# EAGLE board Rev B (EAGLE 6.5.0)
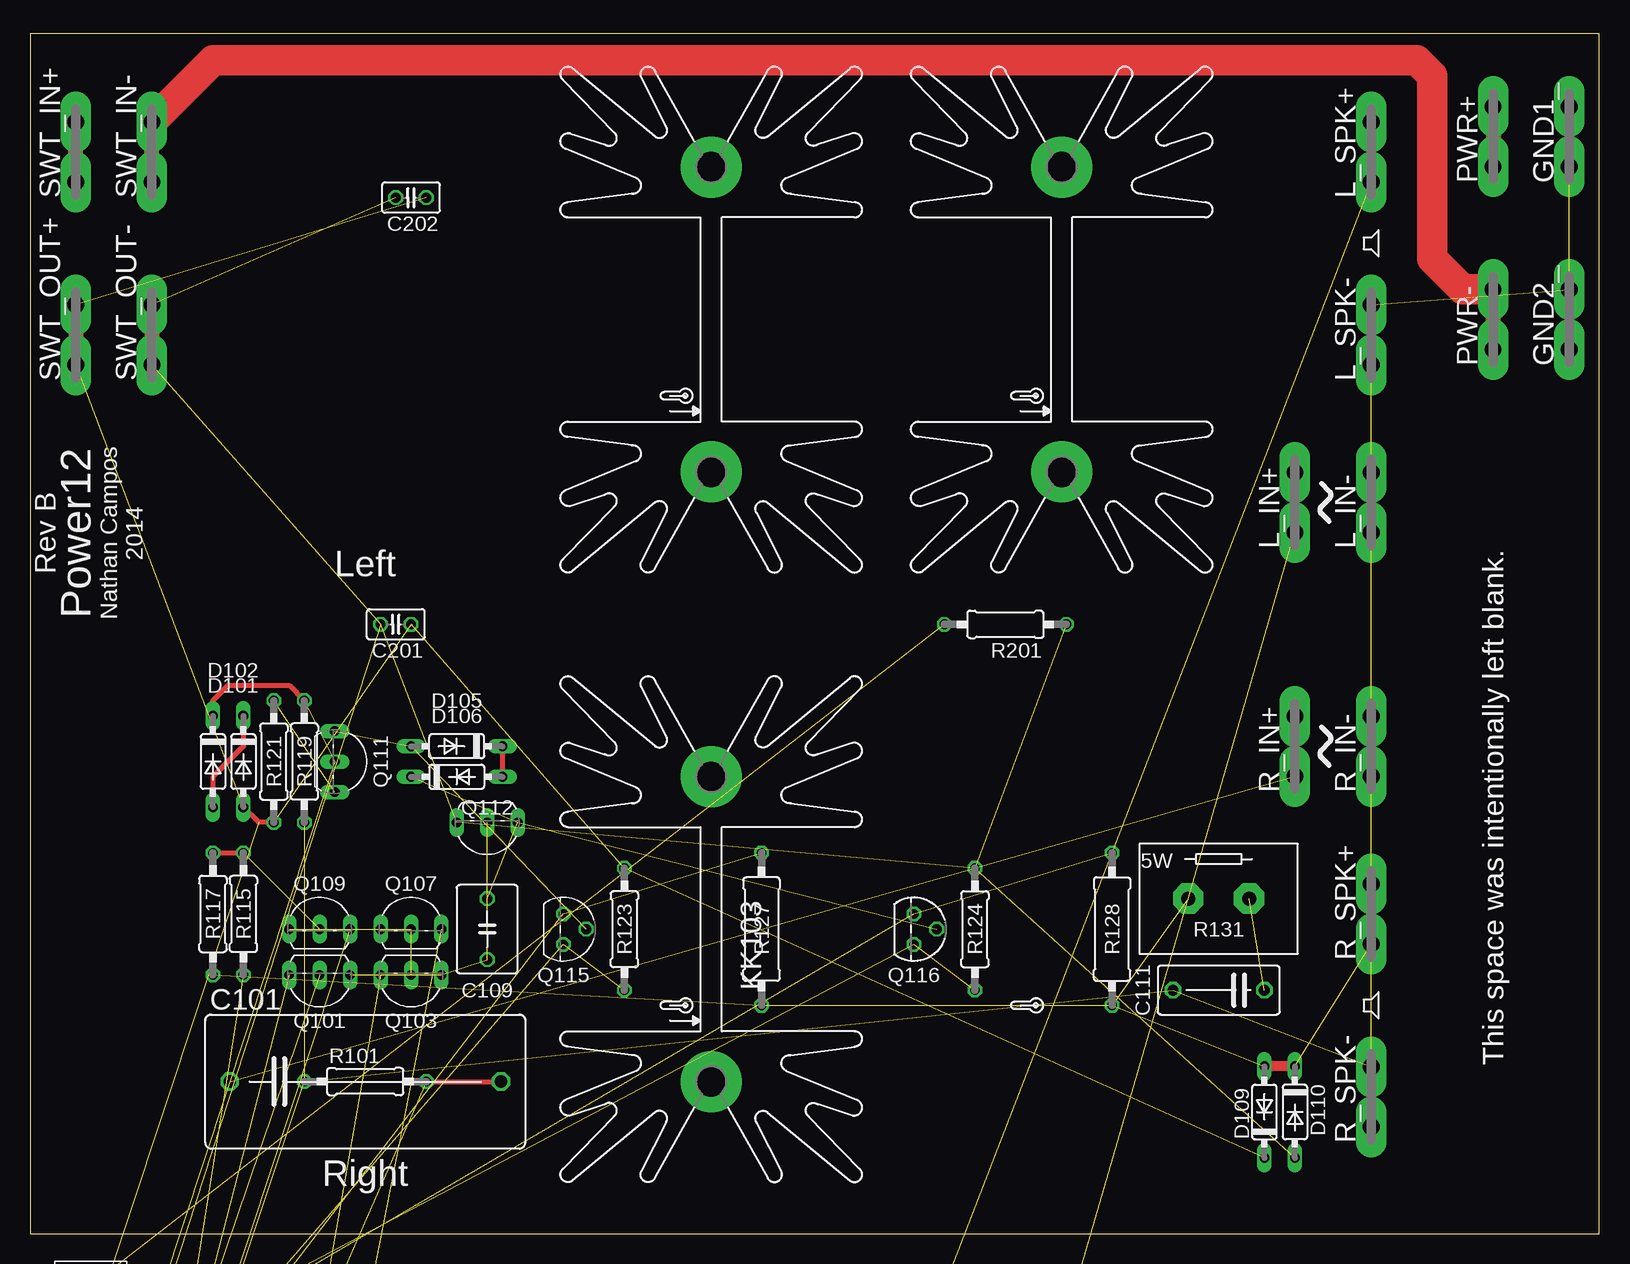
[diagram p0: board, top side]
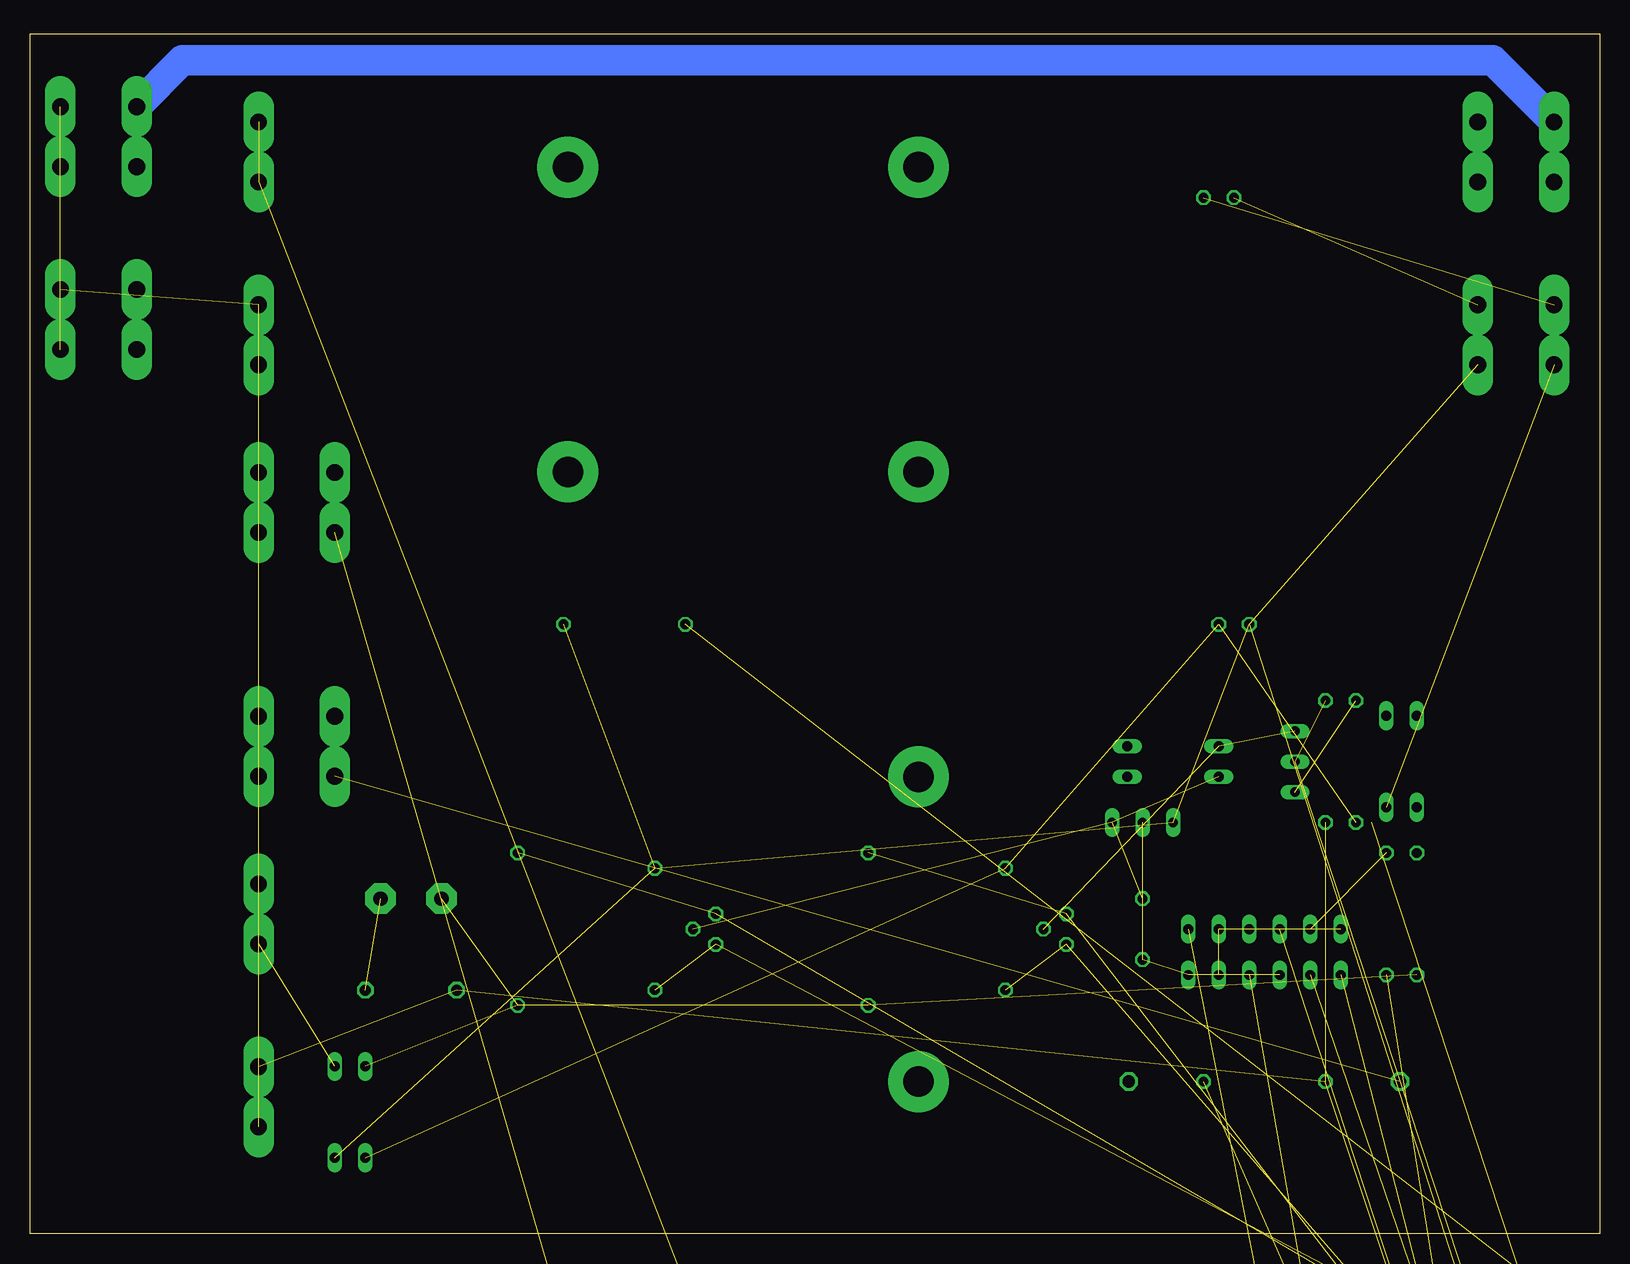
[diagram p1: board, bottom side, seen from below]

Size 130.79 x 100 mm. Coordinates in mm from the lower left corner, seen from the top.
Outline: 0,0 130.79,0 130.79,100 0,100 0,0
Copper layers (1*2*15*16): Top 0.035mm / dielectric 0.2mm / Route2 0.0175mm / dielectric 1.1mm / Route15 0.0175mm / dielectric 0.2mm / Bottom 0.035mm
Design rules "SeeedStudio_DRU_no_angle_20130527": minimum track width 6mil, minimum drill 12mil, track to track 6mil, track to pad 6mil, pad to pad 6mil, via to via 6mil, smd to smd 0mil, copper to edge 10mil, drill to drill 10mil, minimum pad ring 6mil, minimum via ring 6mil, stop-mask expansion 2mil, vias tented up to drill 25mil, thermal gap 10mil

## Footprints (pad centres in the part's own frame; a part is rotated, then mirrored left to right if it is on the bottom)
C225-113X268 = drill 1.016 octagon: 1 -11.303,0; 2 11.303,0
C025-025X050 = drill 0.813 octagon: 1 -1.27,0; 2 1.27,0
E5-10,5 = drill 1.016 pad 2.54: + -2.54,0 | drill 1.016 pad 2.54 octagon: - 2.54,0
E2-5 = drill 0.813 pad 1.27: + -1.016,0 | drill 0.813 pad 1.27 octagon: - 1.016,0
C050-050X075 = drill 0.813 octagon: 1 -2.54,0; 2 2.54,0
C075-042X103 = drill 0.914 octagon: 1 -3.81,0; 2 3.81,0
E7,5-16 = drill 1.016 pad 3.15: + -3.81,0 | drill 1.016 pad 3.15 octagon: - 3.81,0
DO35-7 = drill 0.813 long: A 3.81,0; C -3.81,0
F061.100 = drill 1.4 pad 2.54 long: A1 -2.5,0; A2 2.5,0
SK129 = drill 2.54 pad 5.08: A2,5 -12.7,-0.889; B2,5 12.7,-0.889
JST-PH-2-THM = drill 0.8 pad 1.422: 1 1,0; 2 -1,0
TO92-EBC = drill 0.813 long: B 0,-1.27; C -2.54,-1.27; E 2.54,-1.27
TO92 = drill 0.813 octagon: 1 1.27,0; 2 0,1.905; 3 -1.27,0
TO220AV = drill 1.016 long: B -2.54,-2.54; C 0,-2.54; E 2.54,-2.54
0207/10 = drill 0.813 octagon: 1 -5.08,0; 2 5.08,0
0309/12 = drill 0.813 octagon: 1 -6.35,0; 2 6.35,0
MNS-5 = drill 1.194 pad 2.54 octagon: 1 -2.54,0; 2 2.54,0

## Placement (x,y rotation side)
C101  4.7uF  [C225-113X268]  27.94,12.7 0 top
C102  4.7uF  [C225-113X268]  49.53,-172.72 0 top  (outside the outline)
C103  10nF  [C025-025X050]  -5.08,-67.31 0 top  (outside the outline)
C104  10nF  [C025-025X050]  46.99,-207.01 0 top  (outside the outline)
C105  220uF  [E5-10,5]  -2.54,-121.92 0 top  (outside the outline)
C106  220uF  [E5-10,5]  11.43,-196.85 0 top  (outside the outline)
C107  2.2uF  [E2-5]  -5.08,-73.66 0 top  (outside the outline)
C108  2.2uF  [E2-5]  31.75,-222.25 0 top  (outside the outline)
C109  100pF  [C050-050X075]  38.1,25.4 90 top
C110  100pF  [C050-050X075]  39.37,-208.28 0 top  (outside the outline)
C111  100n  [C075-042X103]  99.06,20.32 180 top
C112  100n  [C075-042X103]  55.88,-207.01 0 top  (outside the outline)
C201  100nF  [C025-025X050]  30.48,50.8 180 top
C202  100nF  [C025-025X050]  31.75,86.36 180 top
C203  4700uF  [E7,5-16]  0,-107.95 0 top  (outside the outline)
C204  4700uF  [E7,5-16]  0,-90.17 0 top  (outside the outline)
D101  1N4148DO35-7  [DO35-7]  17.78,39.37 270 top
D102  1N4148DO35-7  [DO35-7]  15.24,39.37 270 top
D103  1N4148DO35-7  [DO35-7]  16.51,-222.25 0 top  (outside the outline)
D104  1N4148DO35-7  [DO35-7]  -2.54,-222.25 0 top  (outside the outline)
D105  1N4148DO35-7  [DO35-7]  35.56,40.64 180 top
D106  1N4148DO35-7  [DO35-7]  35.56,38.1 0 top
D107  1N4148DO35-7  [DO35-7]  35.56,-215.9 0 top  (outside the outline)
D108  1N4148DO35-7  [DO35-7]  16.51,-215.9 0 top  (outside the outline)
D109  1N4148DO35-7  [DO35-7]  102.87,10.16 90 top
D110  1N4148DO35-7  [DO35-7]  105.41,10.16 270 top
D111  1N4148DO35-7  [DO35-7]  -2.54,-215.9 0 top  (outside the outline)
D112  1N4148DO35-7  [DO35-7]  54.61,-215.9 0 top  (outside the outline)
GND1_  PIN2F061.100  [F061.100]  128.27,91.44 90 top
GND2_  PIN2F061.100  [F061.100]  128.27,76.2 90 top
KK101  SK129-PAD  [SK129]  85.09,76.2 90 top
KK102  SK129-PAD  [SK129]  55.88,76.2 90 top
KK103  SK129-PAD  [SK129]  55.88,25.4 90 top
KK104  SK129-PAD  [SK129]  13.97,-176.53 0 top  (outside the outline)
L_IN+  PIN2F061.100  [F061.100]  105.41,60.96 90 top
L_IN-  PIN2F061.100  [F061.100]  111.76,60.96 90 top
L_SPK+  PIN2F061.100  [F061.100]  111.76,90.17 90 top
L_SPK-  PIN2F061.100  [F061.100]  111.76,74.93 90 top
ON  [JST-PH-2-THM]  5.08,-5.08 0 top  (outside the outline)
PWR+  PIN2F061.100  [F061.100]  121.92,91.44 90 top
PWR-  PIN2F061.100  [F061.100]  121.92,76.2 90 top
Q101  BC560C  [TO92-EBC]  24.13,20.32 180 top
Q102  BC560C  [TO92-EBC]  55.88,-194.31 0 top  (outside the outline)
Q103  BC550B  [TO92-EBC]  31.75,20.32 180 top
Q104  BC550B  [TO92-EBC]  21.59,-207.01 0 top  (outside the outline)
Q105  BC560C  [TO92-EBC]  -5.08,-52.07 0 top  (outside the outline)
Q106  BC560C  [TO92-EBC]  30.48,-207.01 0 top  (outside the outline)
Q107  BC550B  [TO92-EBC]  31.75,26.67 0 top
Q108  BC550B  [TO92-EBC]  3.81,-207.01 0 top  (outside the outline)
Q109  BC560C  [TO92-EBC]  24.13,26.67 0 top
Q110  BC560C  [TO92-EBC]  -5.08,-207.01 0 top  (outside the outline)
Q111  BC560C  [TO92-EBC]  26.67,39.37 270 top
Q112  BC550B  [TO92-EBC]  38.1,33.02 180 top
Q113  BC560C  [TO92-EBC]  46.99,-194.31 0 top  (outside the outline)
Q114  BC550B  [TO92-EBC]  12.7,-207.01 0 top  (outside the outline)
Q115  2N3904  [TO92]  44.45,25.4 270 top
Q116  2N3906  [TO92]  73.66,25.4 270 top
Q117  2N3904  [TO92]  22.86,-228.6 0 top  (outside the outline)
Q118  2N3906  [TO92]  8.89,-228.6 0 top  (outside the outline)
Q119  TIP42C  [TO220AV]  6.35,-20.32 0 top  (outside the outline)
Q120  TIP41C  [TO220AV]  6.35,-10.16 0 top  (outside the outline)
Q121  TIP42C  [TO220AV]  36.83,-191.77 0 top  (outside the outline)
Q122  TIP41C  [TO220AV]  25.4,-191.77 0 top  (outside the outline)
R101  10kΩ  [0207/10]  27.94,12.7 0 top
R102  10kΩ  [0207/10]  40.64,-229.87 0 top  (outside the outline)
R103  100Ω  [0207/10]  -2.54,-80.01 0 top  (outside the outline)
R104  100Ω  [0207/10]  22.86,-240.03 0 top  (outside the outline)
R105  22Ω  [0207/10]  6.35,-57.15 0 top  (outside the outline)
R106  56Ω  [0207/10]  -2.54,-130.81 0 top  (outside the outline)
R107  22Ω  [0207/10]  -2.54,-240.03 0 top  (outside the outline)
R108  56Ω  [0207/10]  35.56,-240.03 0 top  (outside the outline)
R109  100Ω  [0207/10]  -2.54,-62.23 0 top  (outside the outline)
R110  100Ω  [0207/10]  10.16,-240.03 0 top  (outside the outline)
R111  22Ω  [0207/10]  6.35,-52.07 0 top  (outside the outline)
R112  56Ω  [0207/10]  -2.54,-135.89 0 top  (outside the outline)
R113  22Ω  [0207/10]  60.96,-234.95 0 top  (outside the outline)
R114  56Ω  [0207/10]  48.26,-240.03 0 top  (outside the outline)
R115  560Ω  [0207/10]  17.78,26.67 90 top
R116  560Ω  [0207/10]  10.16,-234.95 0 top  (outside the outline)
R117  10kΩ  [0207/10]  15.24,26.67 270 top
R118  10kΩ  [0207/10]  22.86,-234.95 0 top  (outside the outline)
R119  4.7kΩ  [0207/10]  22.86,39.37 90 top
R120  4.7kΩ  [0207/10]  35.56,-234.95 0 top  (outside the outline)
R121  560  [0207/10]  20.32,39.37 270 top
R122  560  [0207/10]  48.26,-234.95 0 top  (outside the outline)
R123  1kΩ  [0207/10]  49.53,25.4 90 top
R124  1kΩ  [0207/10]  78.74,25.4 270 top
R125  1kΩ  [0207/10]  53.34,-229.87 0 top  (outside the outline)
R126  1kΩ  [0207/10]  -2.54,-234.95 0 top  (outside the outline)
R127  0.33Ω  [0309/12]  60.96,25.4 90 top
R128  0.33Ω  [0309/12]  90.17,25.4 270 top
R129  0.33Ω  [0309/12]  48.26,-223.52 0 top  (outside the outline)
R130  0.33Ω  [0309/12]  -1.27,-229.87 0 top  (outside the outline)
R131  10Ω  [MNS-5]  99.06,27.94 180 top
R132  10Ω  [MNS-5]  -1.27,-198.12 0 top  (outside the outline)
R201  4.7kΩ  [0207/10]  81.28,50.8 180 top
R_IN+  PIN2F061.100  [F061.100]  105.41,40.64 90 top
R_IN-  PIN2F061.100  [F061.100]  111.76,40.64 90 top
R_SPK+  PIN2F061.100  [F061.100]  111.76,26.67 90 top
R_SPK-  PIN2F061.100  [F061.100]  111.76,11.43 90 top
SWT_IN+  PIN2F061.100  [F061.100]  3.81,90.17 90 top
SWT_IN-  PIN2F061.100  [F061.100]  10.16,90.17 90 top
SWT_OUT+  PIN2F061.100  [F061.100]  3.81,74.93 90 top
SWT_OUT-  PIN2F061.100  [F061.100]  10.16,74.93 90 top
U$1  [ICON_SPEAKER]  111.76,19.05 0 top
U$2  [ICON_SPEAKER]  111.76,82.55 0 top
U$3  [ICON_TEMP]  83.82,69.85 90 top
U$4  [ICON_TEMP]  54.61,69.85 90 top
U$5  [ICON_TEMP]  83.82,19.05 90 top
U$6  [ICON_TEMP]  54.61,19.05 90 top
U$7  [ICON_AC]  107.95,40.64 90 top
U$8  [ICON_AC]  107.95,60.96 90 top

## Library data of the parts
C101-C112 C201-C204 R101-R130 R201 = rcl
D101-D112 = diode
GND1_ GND2_ L_IN+ L_IN- L_SPK+ L_SPK- PWR+ PWR- R_IN+ R_IN- R_SPK+ R_SPK- SWT_IN+ SWT_IN- SWT_OUT+ SWT_OUT- = con-faston; OC_FARNELL: unknown; OC_NEWARK: unknown
KK101-KK104 = heatsink
ON = adafruit
Q101 Q102 Q105 Q106 Q109-Q111 Q113 Q116 Q118 = transistor-pnp
Q103 Q104 Q107 Q108 Q112 Q114 Q115 Q117 = transistor-npn
Q119-Q122 = transistor-power
R131 R132 = resistor-power; OC_FARNELL: unknown; OC_NEWARK: unknown
U$1-U$8 = dicons

## Nets
GND: C103.2 C104.2 C105.- C106.- C107.- C108.- C111.2 C112.2 C203.+ C204.- GND1_.A1 GND1_.A2 GND2_.A1 GND2_.A2 L_IN-.A1 L_IN-.A2 L_SPK-.A1 L_SPK-.A2 R101.1 R102.1 R119.1 R120.1 R_IN-.A1 R_IN-.A2 R_SPK-.A1 R_SPK-.A2
L_OUT: D111.A D112.C L_SPK+.A1 L_SPK+.A2 R118.2 R129.1 R130.2 R132.2
N$1: D105.A Q111.C Q115.2
N$2: Q109.E R111.1
N$3: Q103.B Q107.B Q107.C Q109.C
N$4: C103.1 Q101.B R103.2
N$5: C101.2 R101.2 R103.1
N$6: C107.+ D102.C Q105.B Q111.B R119.2
N$7: C101.1 R_IN+.A1 R_IN+.A2
N$8: C109.1 Q101.C Q103.C Q112.B
N$9: D101.C D102.A
N$10: ON.2 R201.2
N$11: Q111.E R121.1
N$12: C105.+ R115.1
N$13: Q103.E R106.2
N$14: Q107.E R112.2
N$15: C102.1 L_IN+.A1 L_IN+.A2
N$16: C111.1 R131.1
N$17: Q104.B Q108.B Q108.C Q110.C
N$18: Q101.E R105.1
N$19: Q105.C R105.2 R111.2
N$20: Q105.E R109.1
N$21: C102.2 R102.2 R104.1
N$22: Q110.E R113.1
N$23: C110.1 Q102.C Q104.C Q114.B
N$24: D105.C D106.A
N$25: D107.C D108.A
N$26: Q115.1 Q119.B R123.1
N$27: Q116.1 Q120.B R124.2
N$28: Q116.3 Q120.C R128.1
N$29: Q115.3 Q119.C R127.2
N$30: D107.A Q113.C Q117.2
N$31: C109.2 D106.C Q112.C Q116.2
N$32: Q109.B R115.2 R117.1
N$33: Q117.1 Q121.B R125.1
N$34: Q117.3 Q121.C R129.2
N$35: Q118.1 Q122.B R126.2
N$36: Q118.3 Q122.C R130.1
N$37: C110.2 D108.C Q114.C Q118.2
N$38: Q110.B R116.2 R118.1
N$39: C108.+ D104.C Q106.B Q113.B R120.2
N$40: D103.C D104.A
N$41: Q113.E R122.1
N$42: C112.1 R132.1
N$43: Q102.E R107.1
N$44: Q106.C R107.2 R113.2
N$45: Q106.E R110.1
N$46: C104.1 Q102.B R104.2
N$47: C106.+ R116.1
N$48: Q104.E R108.2
N$49: Q108.E R114.2
R_OUT: D109.A D110.C R117.2 R127.1 R128.2 R131.2 R_SPK+.A1 R_SPK+.A2
SWTIN+: PWR+.A1 PWR+.A2 SWT_IN+.A1 SWT_IN+.A2
SWTIN-: PWR-.A1 PWR-.A2 SWT_IN-.A1 SWT_IN-.A2
V+: C201.1 C202.1 C204.+ D101.A D103.A D109.C D111.C ON.1 Q119.E Q121.E R109.2 R110.2 R121.2 R122.2 R123.2 R125.2 SWT_OUT+.A1 SWT_OUT+.A2
V-: C201.2 C202.2 C203.- D110.A D112.A Q112.E Q114.E Q120.E Q122.E R106.1 R108.1 R112.1 R114.1 R124.1 R126.1 R201.1 SWT_OUT-.A1 SWT_OUT-.A2

## Tracks (layer width: path | path; a pad name or v marks a point on that pad's centre or on a via)
GND  (25 unrouted)
L_OUT  (7 unrouted)
N$1  (2 unrouted)
N$2  (1 unrouted)
N$3  (3 unrouted)
N$4  (2 unrouted)
N$5  (1 unrouted)
  Top 0.406: R101.2 C101.2
N$6  (3 unrouted)
  Top 0.406: D102.C 15.24,44.45 16.51,45.72 21.59,45.72 R119.2
N$7  (1 unrouted)
  Top 0.406: R_IN+.A2 R_IN+.A1
N$8  (3 unrouted)
N$9
  Top 0.406: D101.C 17.78,40.64 15.24,38.1 D102.A
N$10  (1 unrouted)
N$11  (1 unrouted)
N$12  (1 unrouted)
N$13  (1 unrouted)
N$14  (1 unrouted)
N$15  (1 unrouted)
  Top 0.406: L_IN+.A2 L_IN+.A1
N$16  (1 unrouted)
N$17  (3 unrouted)
N$18  (1 unrouted)
N$19  (2 unrouted)
N$20  (1 unrouted)
N$21  (2 unrouted)
N$22  (1 unrouted)
N$23  (3 unrouted)
N$24
  Top 0.406: D105.C D106.A
N$25  (1 unrouted)
N$26  (2 unrouted)
N$27  (2 unrouted)
N$28  (2 unrouted)
N$29  (2 unrouted)
N$30  (2 unrouted)
N$31  (3 unrouted)
N$32  (1 unrouted)
  Top 0.406: R117.1 R115.2
N$33  (2 unrouted)
N$34  (2 unrouted)
N$35  (2 unrouted)
N$36  (2 unrouted)
N$37  (3 unrouted)
N$38  (2 unrouted)
N$39  (4 unrouted)
N$40  (1 unrouted)
N$41  (1 unrouted)
N$42  (1 unrouted)
N$43  (1 unrouted)
N$44  (2 unrouted)
N$45  (1 unrouted)
N$46  (2 unrouted)
N$47  (1 unrouted)
N$48  (1 unrouted)
N$49  (1 unrouted)
R_OUT  (5 unrouted)
  Top 0.813: D110.C D109.A | R_SPK+.A1 R_SPK+.A2
SWTIN+
  Top 1.27: SWT_IN+.A1 SWT_IN+.A2 | PWR+.A2 PWR+.A1
  Bottom 2.54: PWR+.A2 121.92,93.98 118.11,97.79 8.93,97.79 SWT_IN+.A2
SWTIN-
  Top 1.27: SWT_IN-.A1 SWT_IN-.A2 | PWR-.A1 121.88,73.74 121.88,78.74 PWR-.A2
  Top 2.54: 121.88,78.74 119.38,78.74 116.84,81.28 116.84,96.52 115.57,97.79 15.28,97.79 SWT_IN-.A2
V+  (15 unrouted)
  Top 0.406: R121.2 19.05,34.29 D101.A
  Top 1.27: SWT_OUT+.A2 SWT_OUT+.A1
V-  (16 unrouted)
  Top 1.27: SWT_OUT-.A2 SWT_OUT-.A1

## Text on the board
tPlace: Rev B | Power12 | Nathan Campos / 2014 | Left | This space was intentionally left blank. | Right